# Altium PCB NewSmartwatch_V1.PcbDoc
Units mm, origin at the board's own origin, x right, y up, seen from the top; angles counter-clockwise.
Board outline 41.47 x 46.71 mm, 4 copper layers (Top Layer, GND1, GND3, Bottom Layer), stack 1.527 mm thick; 41 components, 42 nets, 260 pads, 107 vias.
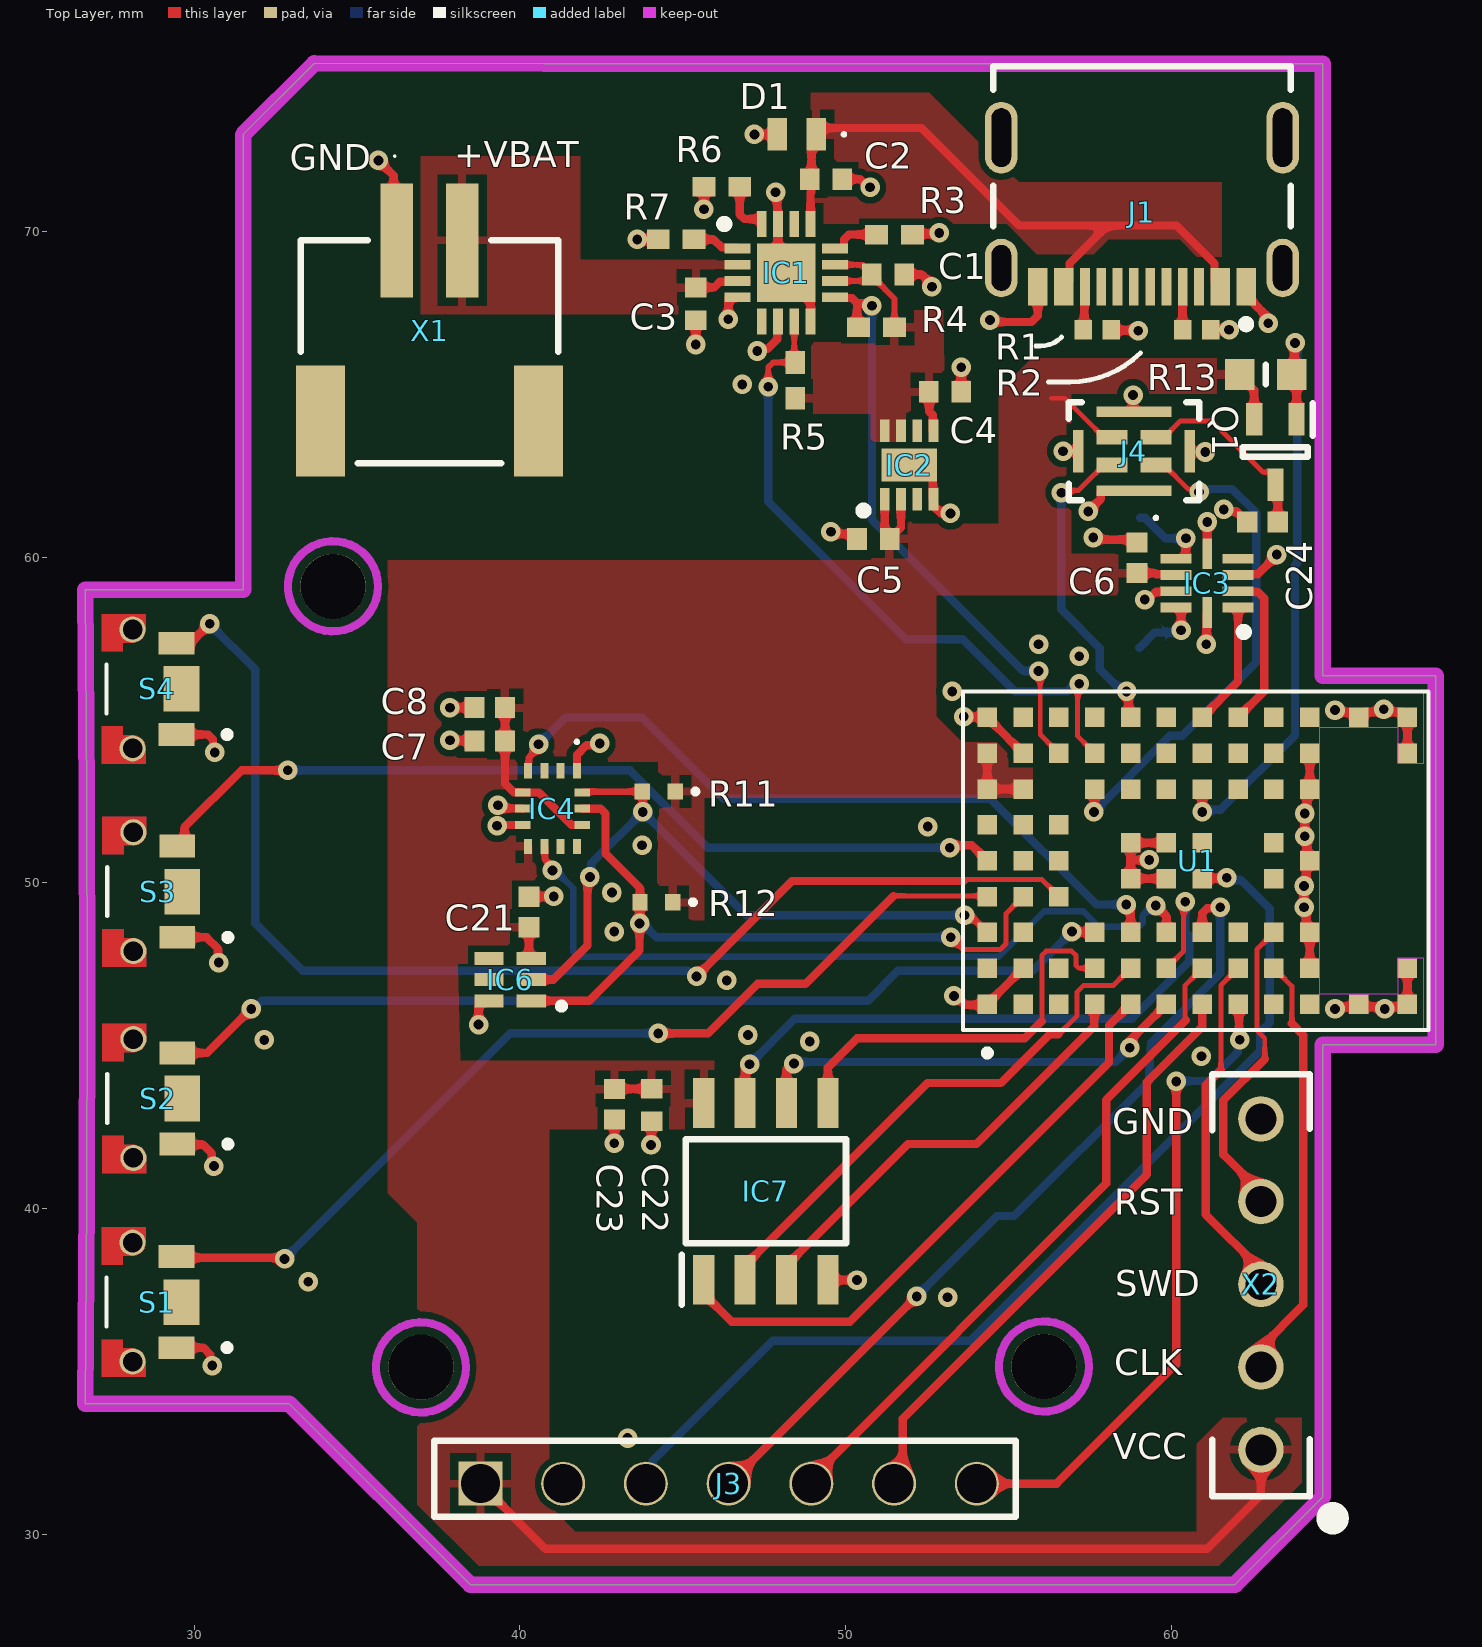
[diagram p0: Top Layer view]
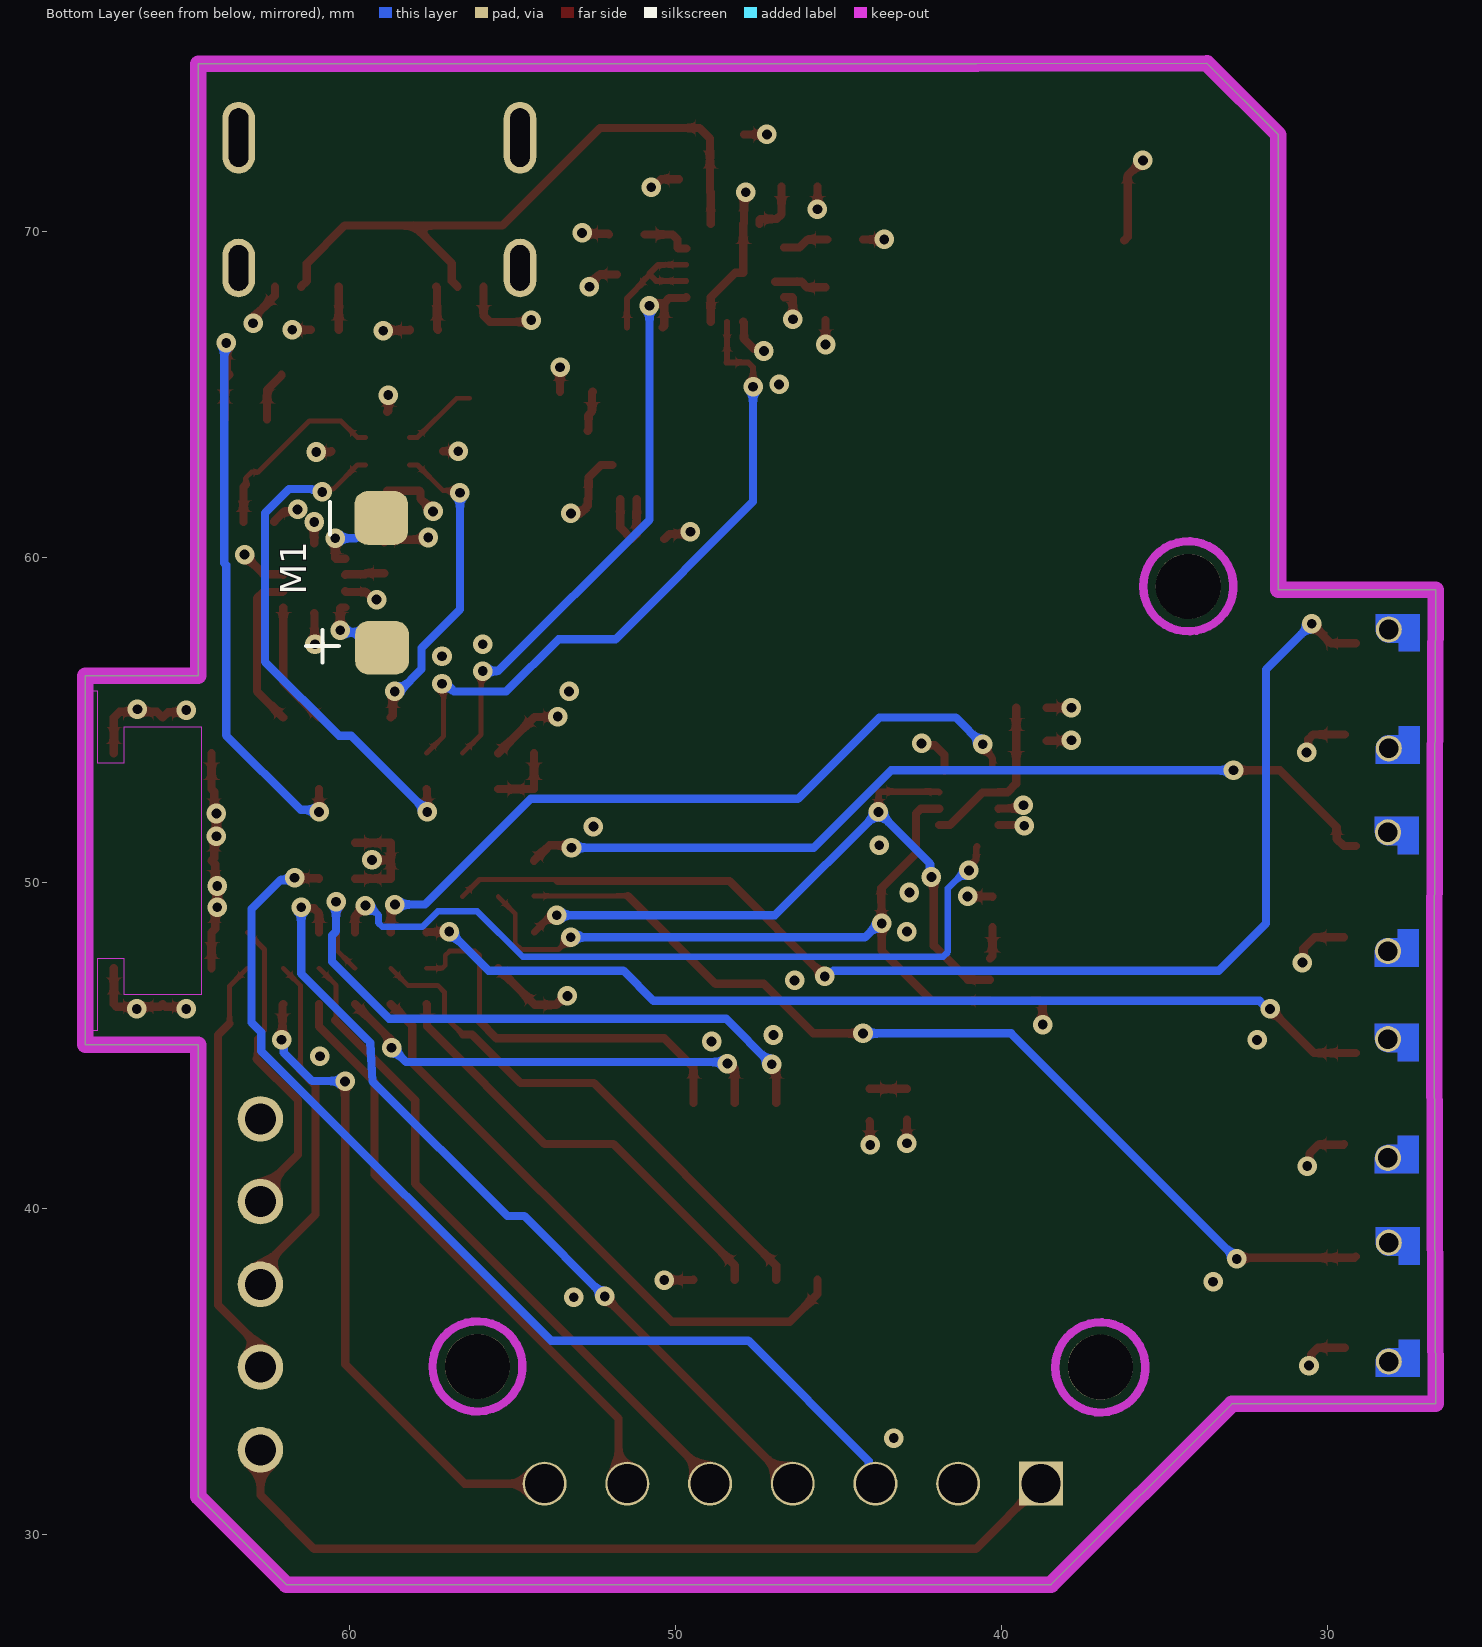
[diagram p1: Bottom Layer view, seen from below]
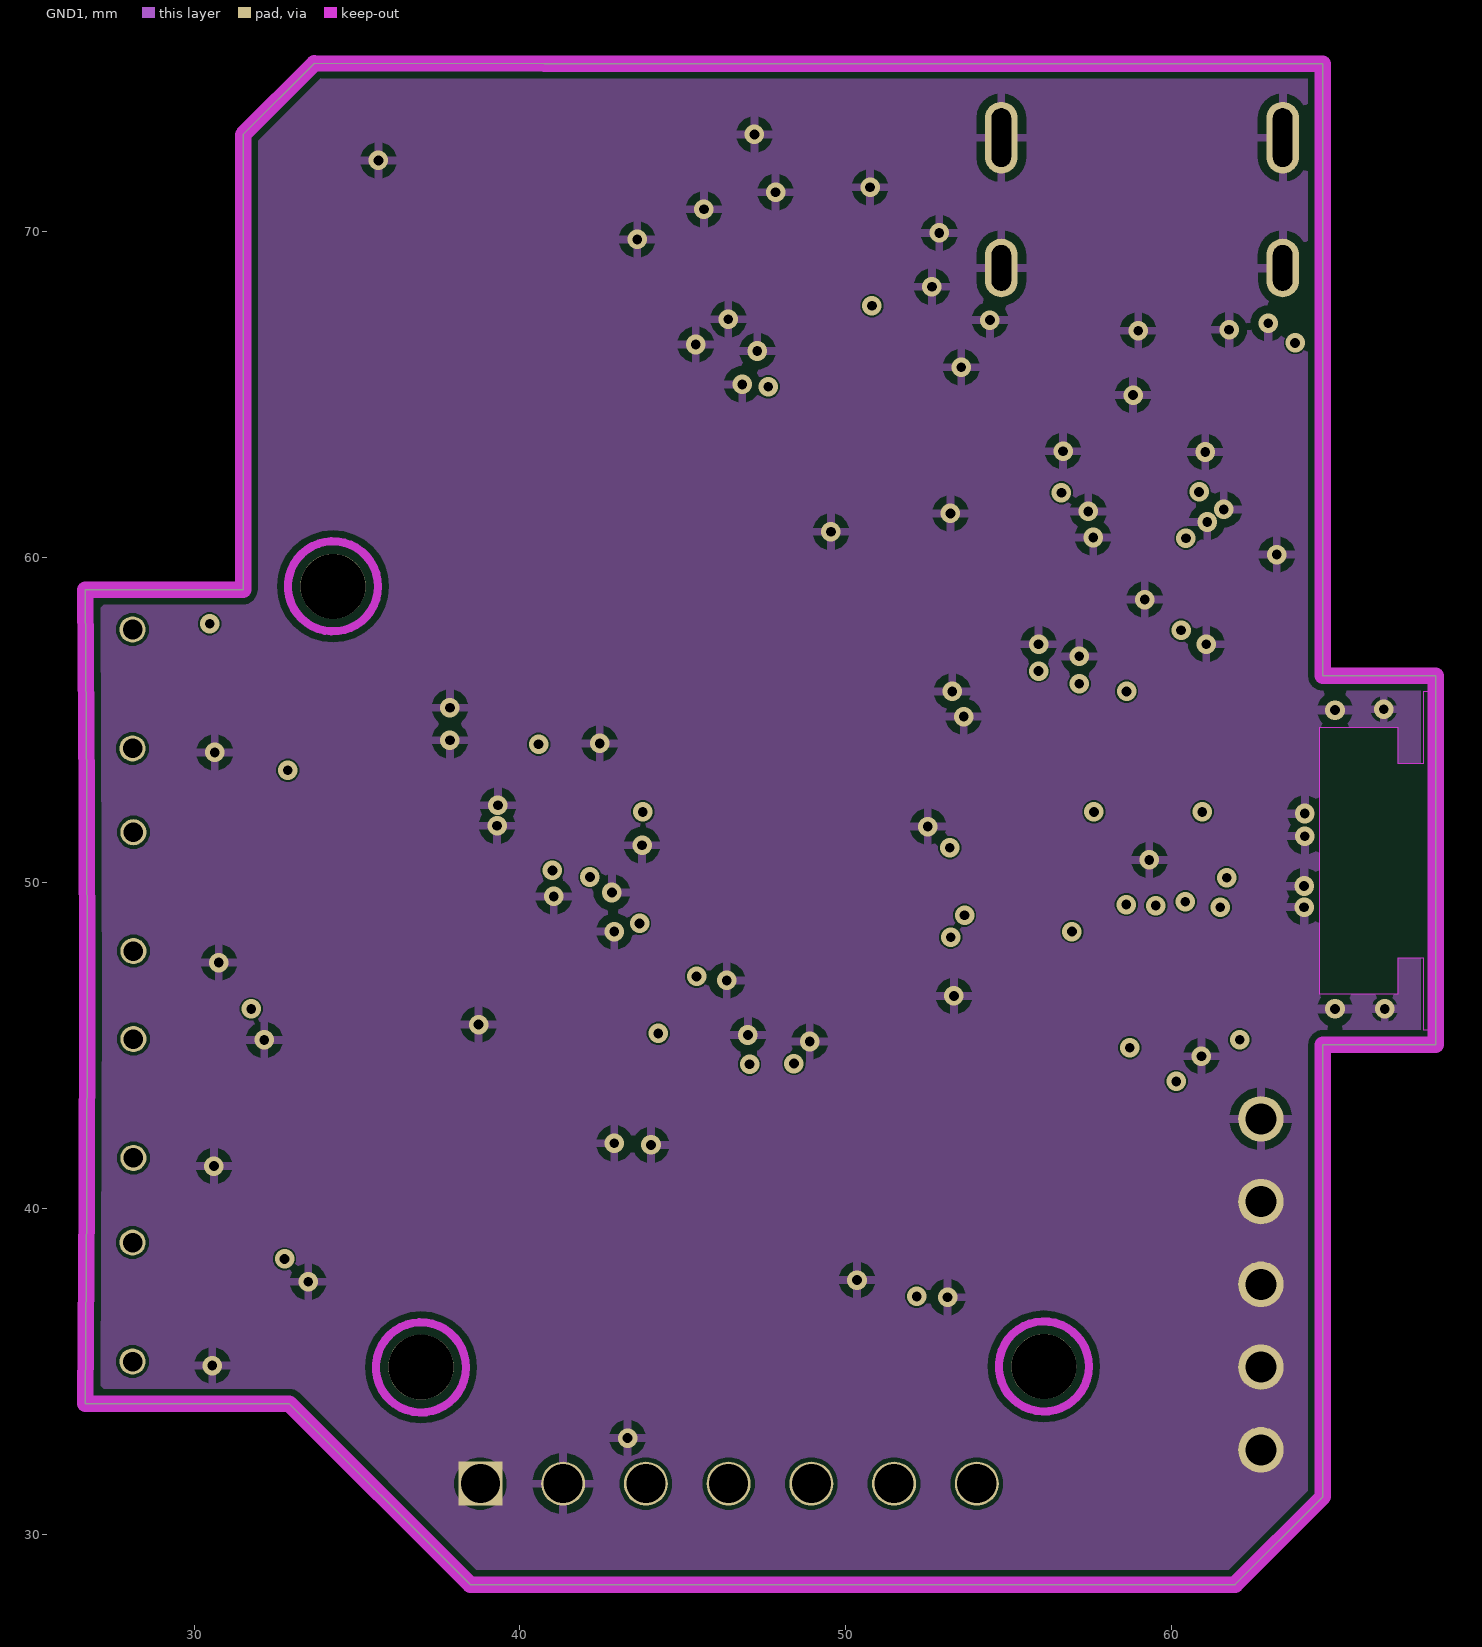
[diagram p2: GND1]
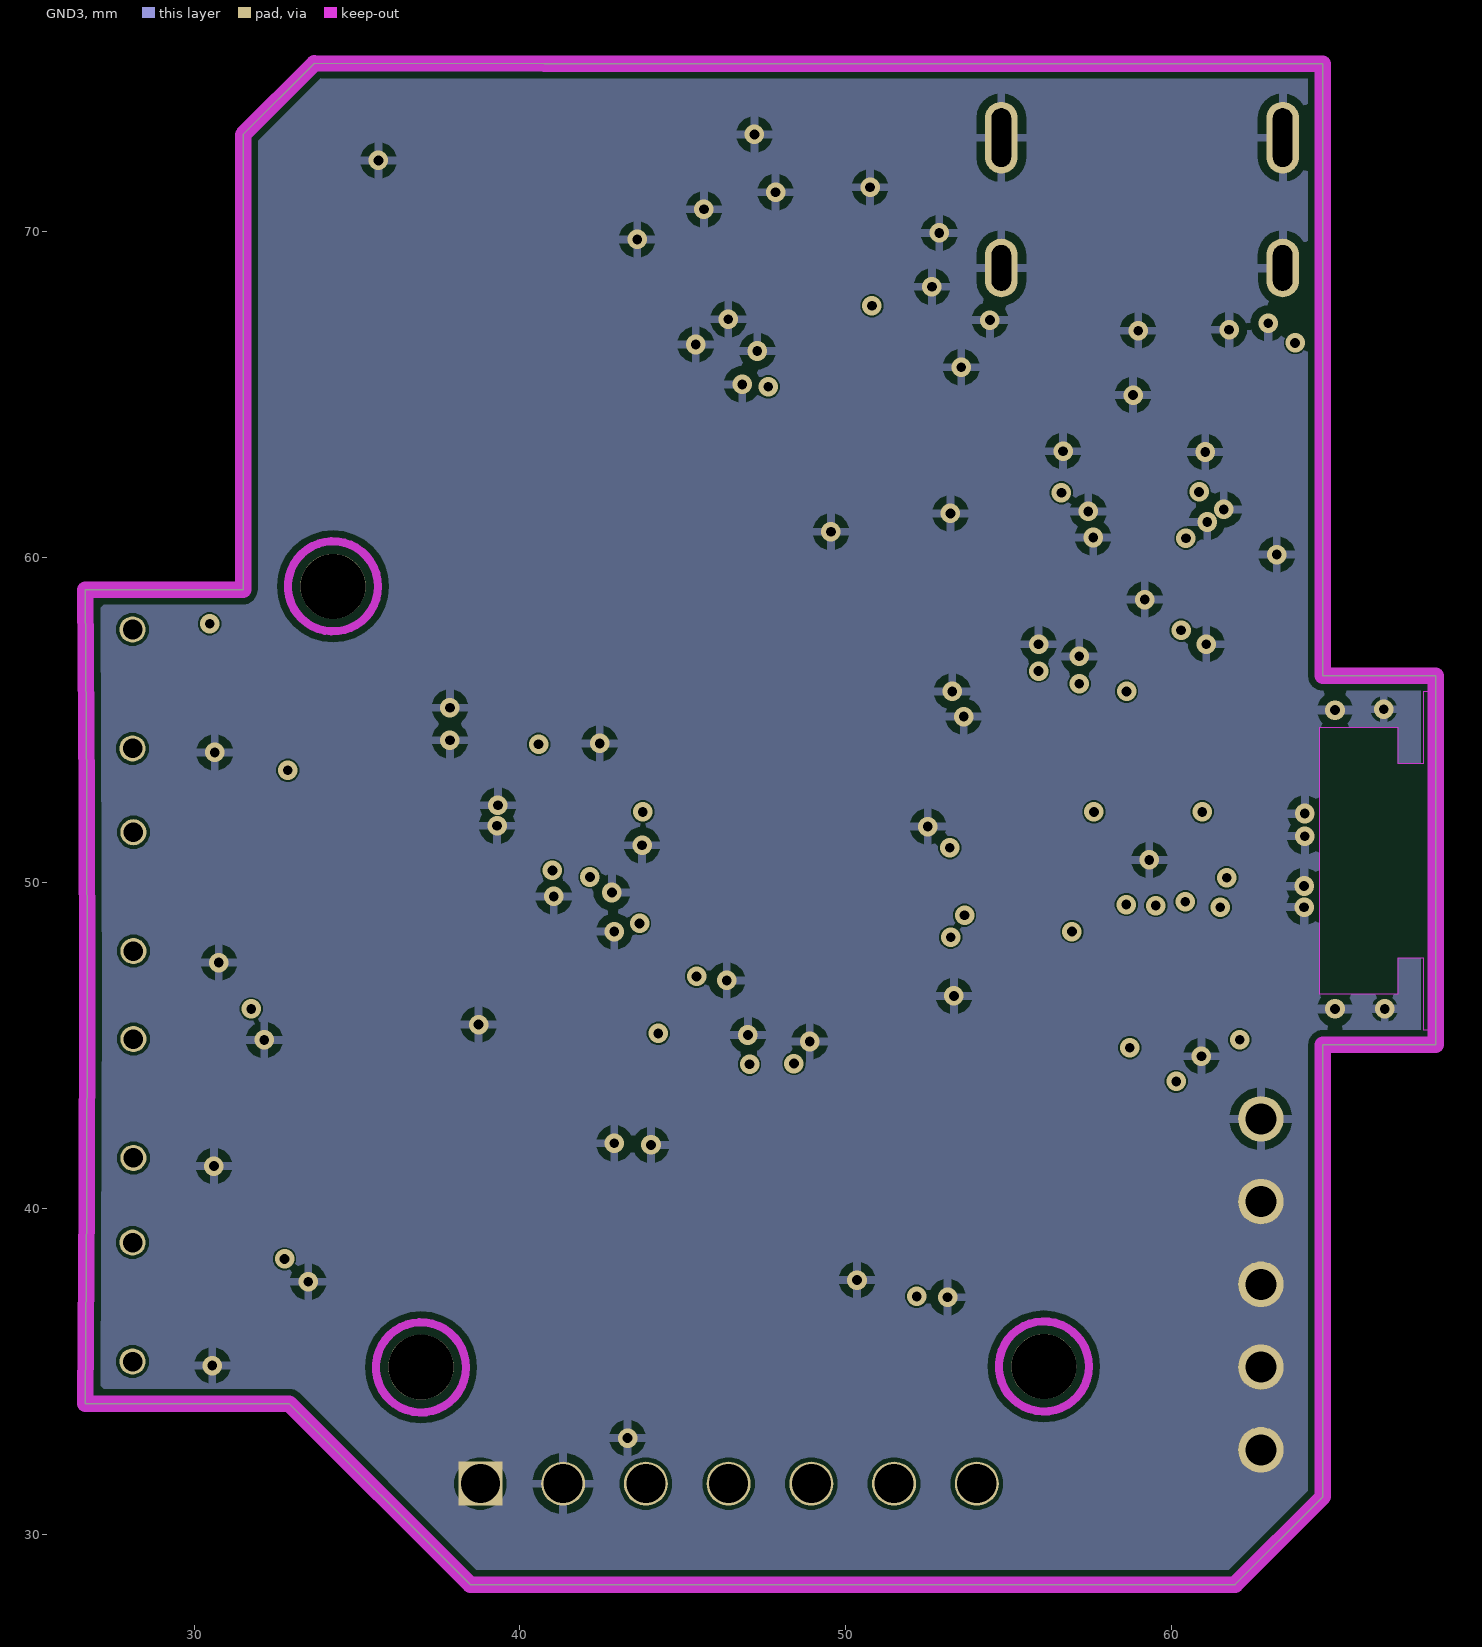
[diagram p3: GND3]
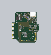
[diagram p4: 3D render of the assembled board from above, using the file's embedded part models]

## Layer stack, top to bottom
Top Solder: solder mask 0.0102, Solder Resist, Dk 3.5
Top Layer: signal copper 0.0175
Dielectric 2: prepreg 0.196, PP-006, Dk 4.1
GND1: signal copper 0.035
Core: core 1.03, PP-006, Dk 4.1
GND3: signal copper 0.035
Dielectric 3: prepreg 0.196, PP-006, Dk 4.1
Bottom Layer: signal copper 0.0175
Bottom Solder: solder mask 0.0102, Solder Resist, Dk 3.5

## Board outline
61.956,28.451 38.474,28.451 32.924,34.001 26.658,34.001 ccw(c-1494.274,46.501) 26.658,59.001 31.499,59.001 31.499,72.969 33.687,75.157 40.749,75.143 64.652,75.143 64.652,56.351 68.124,56.351 68.124,45.026 64.652,45.026 64.652,31.147

## Design rules (kind name [scope] priority, off if disabled: settings)
Clearance SOMkeepOut [InComponent('U1') vs InNet('GND') OR InNet('No Net')] p1: gap=0 ignorepadtopadclearanceinfootprint=TRUE
Clearance SOMTrackwidth [All vs InComponent('U1')] p2: gap=0.15 ignorepadtopadclearanceinfootprint=TRUE
Clearance USB [InNetClass('DIFF90')] p3: gap=0.125 ignorepadtopadclearanceinfootprint=TRUE
Clearance [All] p4: gap=0.2 ignorepadtopadclearanceinfootprint=TRUE
DiffPairsRouting DiffPair_DiffPairsRouting [InDifferentialPairClass('DIFF90')] p1: maxlimit=0.127 minlimit=0.127 mostfreqgap=0.127 toplayer_minwidth=0.28 toplayer_maxwidth=0.28 toplayer_prefwidth=0.28 midlayer1_minwidth=0.122 midlayer1_maxwidth=0.122 midlayer1_prefwidth=0.122 midlayer4_minwidth=0.122 midlayer4_maxwidth=0.122 midlayer4_prefwidth=0.122 bottomlayer_minwidth=0.28 bottomlayer_maxwidth=0.28 bottomlayer_prefwidth=0.28 impedanceprofiledriven=TRUE impedanceprofileid={649FCB01-131D-49EB-AE6B-DDDBD2AFC498} impedanceprofilevalue=90.000000 maxuncoupledlength=12.7
DiffPairsRouting [All] p2: maxlimit=0.254 minlimit=0.254 mostfreqgap=0.254 toplayer_minwidth=0.254 toplayer_maxwidth=0.381 toplayer_prefwidth=0.381 midlayer1_minwidth=0.254 midlayer1_maxwidth=0.381 midlayer1_prefwidth=0.381 midlayer4_minwidth=0.254 midlayer4_maxwidth=0.381 midlayer4_prefwidth=0.381 bottomlayer_minwidth=0.254 bottomlayer_maxwidth=0.381 bottomlayer_prefwidth=0.381 maxuncoupledlength=12.7
MatchedLengths DiffPair_MatchedLengths [InDifferentialPair ('USB_DP1')] p1: tolerance=25.4 checknetsindiffpair=FALSE checkdiffpairvsdiffpair=TRUE checkxsignals=TRUE checkothers=TRUE usedelayunits=TRUE delaytolerance=100.000000
MinimumSolderMaskSliver [All] p1: minsoldermaskwidth=0.1
PlaneConnect [All] p1: planeconnectstyle=Direct reliefexpansion=0.508 reliefentries=4 reliefconductorwidth=0.254 reliefairgap=0.254
PolygonConnect [All] p1: connectstyle=Relief reliefconductorwidth=0.254 reliefentries=4 polygonreliefangle="90 Angle" airgapwidth=0.254
RoutingVias [All] p1: holewidth=0.3 width=0.6 viastyle="Through Hole" minholewidth=0.3 minwidth=0.6 maxholewidth=0.3 maxwidth=0.6
SilkToSilkClearance [All] p1: silktosilkclearance=0.15
SilkToSolderMaskClearance [IsPad] p1: minsilkscreentomaskgap=0.15 clearancetoexposedcopper=TRUE
SolderMaskExpansion [All] p1: expansion=0.102 istentingtop=FALSE
SupplyNets "Schematic Supply Nets_3" [InNet('+3V3')] p1: voltage=0.000
SupplyNets "Schematic Supply Nets_2" [InNet('GND')] p2: voltage=0.000
SupplyNets "Schematic Supply Nets_1" [InNet('VBUS')] p3: voltage=0.000
SupplyNets "Schematic Supply Nets" [InNet('+4V5')] p4: voltage=0.000
ViasUnderSMD [All] p1: allowed=FALSE
Width [All] p1: maxlimit=1.27 minlimit=0.1 preferedwidth=0.254 midlayer1_minwidth=0.152 midlayer1_maxwidth=0.254 midlayer4_minwidth=0.254 midlayer4_maxwidth=0.254 bottomlayer_maxwidth=0.254 minimp=50.000000 maximp=50.000000 favimp=50.000000
25 further rules are at their usual default settings.

## Components (designator, comment, footprint, x,y, rotation, side; value= is the part's Value field where it differs from the comment)
C1 "4.7uF" CAPC1005X65N 51.3,68.675 r180 top
C2 "1uF" CAPC1005X65N 49.399,71.601 r180 top
C3 "4.7uF" CAPC1005X65N 45.399,67.776 r90 top
C4 "1uF" CAPC1005X65N 53.049,65.076 r180 top
C5 "1uF" CAPC1005X65N 50.849,60.551 r0 top
C6 "0402X7R104KT7AT" CAPC1005X61N 58.949,59.976 r270 top
C7 "0.1uF" CAPC1005X61N 39.074,54.352 r0 top
C8 "0.1uF" CAPC1005X61N 39.074,55.377 r0 top
C21 "0.1uF" CAPC1005X61N 40.274,49.102 r270 top
C22 "1uF" CAPC1005X65N 44.049,43.176 r270 top
C23 "0.1uF" CAPC1005X61N 42.899,43.201 r270 top
C24 "0.1uF" CAPC1005X61N 62.799,61.076 r180 top
D1 "STN161050U852" STN161050U852 48.499,72.976 r180 top
IC1 "BQ24075TRGTR" QFN50P300X300X100-17N-D 48.174,68.726 r0 top
IC2 "TPS7A2112PQWDSGRQ1" SON50P200X200X80-9N 51.949,62.826 r90 top
IC3 "DRV2603RUNT" QFN50P200X200X80-10N-D 61.099,59.201 r180 top
IC4 "BMI270" BMI270 40.999,52.277 r270 top
IC6 "APDS-9306-065" APDS9306065 39.699,47.027 r90 top
IC7 "AT25SF041B-SSHD-B" SOIC127P600X175-8N 47.549,40.526 r90 top
J1 "USB-C" FP-2171790001-MFG 59.099,71.726 r180 top locked
J3 "M22-7130742" SHDR7W50P0X200_1X7_1450X240X440P 38.599,31.551 r0 top locked
J4 "SPK0641HT4H-1" SPK0641HT4H1 58.852,63.251 r90 top
M1 "FIT0774" FIT0774 58.99,59.196 r90 bottom
Q1 "DMG1013UW-7" SOT65P210X110-3N 63.195,63.226 r270 top
R1 "5.1k" RESC1005X40 57.724,66.976 r0 top value=5.11kR
R2 "5.1k" RESC1005X40 60.774,66.976 r0 top value=5.11kR
R3 "10k" RESC1005X37N 51.499,69.901 r0 top
R4 "10k" RESC1005X37N 50.949,67.051 r180 top
R5 "10k" RESC1005X37N 48.449,65.426 r90 top
R6 "1.13K" RESC1005X37N 46.199,71.376 r0 top value=1.13kR
R7 "10k" RESC1005X37N 44.799,69.751 r0 top
R11 "4.7K" ERJPA2_(0402) 44.274,52.802 r180 top
R12 "4.7K" ERJPA2_(0402) 44.199,49.402 r180 top
R13 "150K" RESC1608X55N 62.899,65.601 r180 top
S1 "TL6340AF160Q" SW_TL6340AF160Q 28.106,37.126 r90 top
S2 "TL6340AF160Q" SW_TL6340AF160Q 28.131,43.376 r90 top
S3 "TL6340AF160Q" SW_TL6340AF160Q 28.131,49.726 r90 top
S4 "TL6340AF160Q" SW_TL6340AF160Q 28.106,55.951 r90 top
U1 "NORA-B106-00B" XCVR_NORA-B106-00B 59.849,50.676 r0 top locked
X1 "1769" 1769 37.224,69.726 r0 top
X2 "DOCK" SAMTEC_FTSH-105-XX-X-DV 59.799,30.416 r90 top locked

## Footprints (in the part's own frame and the unit in brackets; to place one, negate y for a bottom-side part, rotate by r counter-clockwise, add the part's x,y. Pads: shape width x height; smd on the part's side, far side on the other; paste and mask are expansions set on the pad)
1769 [mm]
  rect 1x3.5 smd: 1(-1,0) 2(1,0)
  rect 1.5x3.4 smd: 3(-3.35,-5.55) 4(3.35,-5.55)
  silkscreen extent -3.95,-6.85 3.95,2.61, body extent -3.95,-7.07 3.95,1.53, height 4.8
APDS9306065 [mm]
  rect 0.4x0.9 smd mask+0.051: 1(-0.65,-0.65) 2(0,-0.65) 3(0.65,-0.65) 4(0.65,0.65) 5(0,0.65) 6(-0.65,0.65)
  silkscreen extent -0.91,-1.67 -0.71,-1.47, body extent -1,-1 1,1, height 0.75
BMI270 [mm]
  rect 0.475x0.25 smd mask+0.051: 1(-1.163,0.75) 2(-1.163,0.25) 3(-1.163,-0.25) 4(-1.163,-0.75) 8(1.163,-0.75) 9(1.163,-0.25) 10(1.163,0.25) 11(1.163,0.75)
  rect 0.25x0.475 smd mask+0.051: 5(-0.5,-0.913) 6(0,-0.913) 7(0.5,-0.913) 12(0.5,0.913) 13(0,0.913) 14(-0.5,0.913)
  silkscreen extent -2.1,0.7 -2,0.8, body extent -1.5,-1.25 1.5,1.25, height 0.97
CAPC1005X61N [mm]
  rect 0.62x0.65 smd: 1(-0.47,0) 2(0.47,0)
  body extent -0.51,-0.26 0.51,0.26, height 0.61
CAPC1005X65N [mm]
  rect 0.6x0.67 smd: 1(-0.5,0) 2(0.5,0)
  body extent -0.5,-0.25 0.5,0.25, height 0.55
ERJPA2_(0402) [mm]
  rect 0.475x0.5 smd: 1(-0.5,0) 2(0.513,0)
  silkscreen extent -1.16,-0.05 -1.06,0.05, body extent -0.5,-0.25 0.5,0.25, height 0.35
FIT0774 [mm]
  rrect50% 1.65x1.65 smd paste-2539.97 mask-2539.97: +(-1.981,0.025) -(2.007,0.051)
  silkscreen extent -2.43,1.35 2.5,2.35
FP-2171790001-MFG [mm]
  rect 0.6x1.15 smd paste+0 mask+0: A1B12(-3.2,3.425) A4B9(-2.4,3.425) B1A12(3.2,3.425) B4A9(2.4,3.425)
  rect 0.3x1.15 smd paste+0 mask+0: A5(-1.25,3.425) A6(-0.25,3.425) A7(0.25,3.425) A8(1.25,3.425) B5(1.75,3.425) B6(0.75,3.425) B7(-0.75,3.425) B8(-1.75,3.425)
  rrect100% 1x1.8 hole 1.4 slot 0.6 at 0 deg paste-2539.97 mask+0: S1(-4.32,2.85) S2(4.32,2.85)
  rrect100% 1x2.2 hole 1.8 slot 0.6 at 0 deg paste-2539.97 mask+0: S3(-4.32,-1.15) S4(4.32,-1.15)
  silkscreen extent -4.57,-3.35 4.57,4.7, body extent -4.92,-3.45 4.92,4.1, height 0.25
QFN50P200X200X80-10N-D [mm]
  rect 0.95x0.3 smd: 1(-0.95,0.75) 2(-0.95,0.25) 3(-0.95,-0.25) 4(-0.95,-0.75) 6(0.95,-0.75) 7(0.95,-0.25) 8(0.95,0.25) 9(0.95,0.75)
  rect 0.3x0.95 smd: 5(0,-0.9) 10(0,0.9)
  silkscreen extent -1.25,1.38 -1,1.62, body extent -1,-1 1,1, height 0.8
QFN50P300X300X100-17N-D [mm]
  rect 0.8x0.3 smd: 1(-1.5,0.75) 2(-1.5,0.25) 3(-1.5,-0.25) 4(-1.5,-0.75) 9(1.5,-0.75) 10(1.5,-0.25) 11(1.5,0.25) 12(1.5,0.75)
  rect 0.3x0.8 smd: 5(-0.75,-1.5) 6(-0.25,-1.5) 7(0.25,-1.5) 8(0.75,-1.5) 13(0.75,1.5) 14(0.25,1.5) 15(-0.25,1.5) 16(-0.75,1.5)
  rect 1.8x1.8 smd: 17(0,0)
  silkscreen extent -2.02,1.38 -1.77,1.62, body extent -1.55,-1.55 1.55,1.55, height 1
RESC1005X37N [mm]
  rect 0.7x0.6 smd: 1(-0.55,0) 2(0.55,0)
  body extent -0.5,-0.25 0.5,0.25, height 0.32
RESC1005X40 [mm]
  rect 0.54x0.6 smd: 1(-0.43,0) 2(0.43,0)
RESC1608X55N [mm]
  rect 0.9x0.95 smd: 1(-0.8,0) 2(0.8,0)
  silkscreen extent 0,-0.3 0,0.3, body extent -0.8,-0.4 0.8,0.4, height 0.55
SAMTEC_FTSH-105-XX-X-DV [mm]
  round 1.4 hole 0.95: 1(2.175,-2.95) 2(4.715,-2.95) 3(7.255,-2.95) 4(9.795,-2.95) 5(12.335,-2.95)
  silkscreen extent -0.17,-5.4 13.7,-1.45
SHDR7W50P0X200_1X7_1450X240X440P [mm]
  round 1.35 hole 1.2: 1(15.427,0) 2(12.887,0) 3(10.347,0) 4(7.807,0) 5(5.267,0) 6(2.727,0)
  rect 1.35x1.35 hole 1.2: 7(0.187,0)
  silkscreen extent -1.22,-1.02 16.63,1.33
SOIC127P600X175-8N [mm]
  rect 1.525x0.65 smd: 1(-2.712,1.905) 2(-2.712,0.635) 3(-2.712,-0.635) 4(-2.712,-1.905) 5(2.712,-1.905) 6(2.712,-0.635) 7(2.712,0.635) 8(2.712,1.905)
  silkscreen extent -3.47,-2.46 1.6,2.58, body extent -3,-2.46 3,2.46, height 1.75
SON50P200X200X80-9N [mm]
  rect 0.7x0.3 smd: 1(-1.05,0.75) 2(-1.05,0.25) 3(-1.05,-0.25) 4(-1.05,-0.75) 5(1.05,-0.75) 6(1.05,-0.25) 7(1.05,0.25) 8(1.05,0.75)
  rect 1x1.7 smd: 9(0,0)
  silkscreen extent -1.52,1.27 -1.28,1.52, body extent -1,-1 1,1, height 0.77
SOT65P210X110-3N [mm]
  rect 1x0.5 smd: 1(-1,0.65) 2(-1,-0.65) 3(1,0)
  silkscreen extent -1.5,-1 0.15,1.15, body extent -1.05,-1 1.05,1, height 1.1
SPK0641HT4H1 [mm]
  rect 0.45x0.95 smd: 1(-0.425,-0.675) 2(-0.425,0.675) 3(0.425,0.675) 4(0.425,-0.675)
  rect 1.3x0.325 smd: 5(0,-1.712) 7(0,1.712)
  rect 0.325x2.3 smd: 6(-1.212,0) 8(1.212,0)
  silkscreen extent -2.1,-2 1.5,2, body extent -1.5,-2 1.5,2, height 1
STN161050U852 [mm]
  rect 0.6x1 smd: 1(-0.6,0) 2(0.6,0)
  silkscreen extent -1.5,-0.05 -1.4,0.05, body extent -0.8,-0.5 0.8,0.5, height 0.5
SW_TL6340AF160Q [mm]
  rect 0.7x1.1 smd: 1(-1.4,-1.35) 2(1.4,-1.35)
  round 0.8 hole 0.6 mask+0: SH1(-1.825,0) SH2(1.825,0)
  rect 1.4x1.1 smd: SH3(0,-1.5)
  Top Layer region: 2.3,-0.4 1.825,-0.4 1.804,-0.399 1.783,-0.398 1.762,-0.395 1.742,-0.391 1.721,-0.386 1.701,-0.38 1.682,-0.373 1.662,-0.365 1.643,-0.356 1.625,-0.346 1.607,-0.335 1.59,-0.324 1.573,-0.311 1.557,-0.297 1.542,-0.283 1.528,-0.268 1.514,-0.252 1.501,-0.235 1.49,-0.218 1.479,-0.2 1.469,-0.182 1.46,-0.163 1.452,-0.143 1.445,-0.124 1.439,-0.104 1.434,-0.083 1.43,-0.063 1.427,-0.042 1.426,-0.021 1.425,0 1.425,0.3 1.15,0.3 1.15,0.95 2.3,0.95
  Top Layer region: -1.15,0.3 -1.425,0.3 -1.425,0 -1.426,-0.021 -1.427,-0.042 -1.43,-0.063 -1.434,-0.083 -1.439,-0.104 -1.445,-0.124 -1.452,-0.143 -1.46,-0.163 -1.469,-0.182 -1.479,-0.2 -1.49,-0.218 -1.501,-0.235 -1.514,-0.252 -1.528,-0.268 -1.542,-0.283 -1.557,-0.297 -1.573,-0.311 -1.59,-0.324 -1.607,-0.335 -1.625,-0.346 -1.643,-0.356 -1.662,-0.365 -1.682,-0.373 -1.701,-0.38 -1.721,-0.386 -1.742,-0.391 -1.762,-0.395 -1.783,-0.398 -1.804,-0.399 -1.825,-0.4 -2.3,-0.4 -2.3,0.95 -1.15,0.95
  Bottom Layer region: 2.3,-0.4 1.825,-0.4 1.804,-0.399 1.783,-0.398 1.762,-0.395 1.742,-0.391 1.721,-0.386 1.701,-0.38 1.682,-0.373 1.662,-0.365 1.643,-0.356 1.625,-0.346 1.607,-0.335 1.59,-0.324 1.573,-0.311 1.557,-0.297 1.542,-0.283 1.528,-0.268 1.514,-0.252 1.501,-0.235 1.49,-0.218 1.479,-0.2 1.469,-0.182 1.46,-0.163 1.452,-0.143 1.445,-0.124 1.439,-0.104 1.434,-0.083 1.43,-0.063 1.427,-0.042 1.426,-0.021 1.425,0 1.425,0.3 1.15,0.3 1.15,0.95 2.3,0.95
  Bottom Layer region: -1.15,0.3 -1.425,0.3 -1.425,0 -1.426,-0.021 -1.427,-0.042 -1.43,-0.063 -1.434,-0.083 -1.439,-0.104 -1.445,-0.124 -1.452,-0.143 -1.46,-0.163 -1.469,-0.182 -1.479,-0.2 -1.49,-0.218 -1.501,-0.235 -1.514,-0.252 -1.528,-0.268 -1.542,-0.283 -1.557,-0.297 -1.573,-0.311 -1.59,-0.324 -1.607,-0.335 -1.625,-0.346 -1.643,-0.356 -1.662,-0.365 -1.682,-0.373 -1.701,-0.38 -1.721,-0.386 -1.742,-0.391 -1.762,-0.395 -1.783,-0.398 -1.804,-0.399 -1.825,-0.4 -2.3,-0.4 -2.3,0.95 -1.15,0.95
  silkscreen extent -1.5,-3 0.75,0.8, body extent -1.92,-1.35 1.92,1.55, height 1.55
XCVR_NORA-B106-00B [mm]
  rect 0.6x0.6 smd: A1(-5.5,-4.4) A2(-5.5,-3.3) A3(-5.5,-2.2) A4(-5.5,-1.1) A5(-5.5,0) A6(-5.5,1.1) A7(-5.5,2.2) A8(-5.5,3.3) A9(-5.5,4.4) B1(-4.4,-4.4) B2(-4.4,-3.3) B3(-4.4,-2.2) B4(-4.4,-1.1) B5(-4.4,0) B6(-4.4,1.1) B7(-4.4,2.2) B8(-4.4,3.3) B9(-4.4,4.4) C1(-3.3,-4.4) C2(-3.3,-3.3) C4(-3.3,-1.1) C5(-3.3,0) C6(-3.3,1.1) C8(-3.3,3.3) C9(-3.3,4.4) D1(-2.2,-4.4) D2(-2.2,-3.3) D3(-2.2,-2.2) D7(-2.2,2.2) D8(-2.2,3.3) D9(-2.2,4.4) E1(-1.1,-4.4) E2(-1.1,-3.3) E3(-1.1,-2.2) E4(-1.1,-0.55) E5(-1.1,0.55) E7(-1.1,2.2) E8(-1.1,3.3) E9(-1.1,4.4) F1(0,-4.4) F2(0,-3.3) F3(0,-2.2) F4(0,-0.55) F5(0,0.55) F7(0,2.2) F8(0,3.3) F9(0,4.4) G1(1.1,-4.4) G2(1.1,-3.3) G3(1.1,-2.2) G4(1.1,-0.55) G5(1.1,0.55) G7(1.1,2.2) G8(1.1,3.3) G9(1.1,4.4) H1(2.2,-4.4) H2(2.2,-3.3) H3(2.2,-2.2) H7(2.2,2.2) H8(2.2,3.3) H9(2.2,4.4) J1(3.3,-4.4) J2(3.3,-3.3) J3(3.3,-2.2) J4(3.3,-0.55) J5(3.3,0.55) J7(3.3,2.2) J8(3.3,3.3) J9(3.3,4.4) K1(4.4,-4.4) K2(4.4,-3.3) K3(4.4,-2.2) K5(4.4,0) K7(4.4,2.2) K8(4.4,3.3) K9(4.4,4.4) L1(5.9,-4.4) L9(5.9,4.4) M1(7.4,-4.4) M2(7.4,-3.3) M8(7.4,3.3) M9(7.4,4.4)
  Keep-Out Layer region: 8.05,-5.2 7.9,-5.2 7.9,-3 7.1,-3 7.1,-4.1 4.7,-4.1 4.7,4.1 7.1,4.1 7.1,3 7.9,3 7.9,5.2 8.05,5.2
  Keep-Out Layer region: 8.05,-5.2 7.9,-5.2 7.9,-3 7.1,-3 7.1,-4.1 4.7,-4.1 4.7,4.1 7.1,4.1 7.1,3 7.9,3 7.9,5.2 8.05,5.2
  Keep-Out Layer region: 8.05,-5.2 7.9,-5.2 7.9,-3 7.1,-3 7.1,-4.1 4.7,-4.1 4.7,4.1 7.1,4.1 7.1,3 7.9,3 7.9,5.2 8.05,5.2
  silkscreen extent -6.25,-6 8.05,5.2

## Part data
C1 C3: library part GRM31CR61A475KA01L, "Multilayer Ceramic Capacitors MLCC - SMD/SMT 4.7 uF 10 VDC 20% 0402 X5R", Manufacturer_Name="Murata Electronics", Mouser Part Number=81-GRM426R475K10L, Arrow Part Number=GRM31CR61A475KA01L, Arrow Price/Stock=https://www.arrow.com/en/products/grm31cr61a475ka01l/murata-manufacturing, Datasheet Link=http://www.murata.com/~/media/webrenewal/support/library/catalog/products/capacitor/mlcc/c02e.pdf, Height=1.8mm, Manufacturer_Part_Number=GRM31CR61A475KA01L, Mouser Price/Stock=https://www.mouser.co.uk/ProductDetail/Murata-Electronics/GRM31CR61A475KA01L?qs=v6FXEKp3YeVDfOIVbbYCqg%3D%3D
C2 C4 C5 C22: library part CC0402KRX5R6BB105, "Multilayer Ceramic Capacitors MLCC - SMD/SMT 10V 1uF X5R 0402 10% HI CV", Manufacturer_Name=YAGEO, Mouser Part Number=603-CC402KRX5R6BB105, Arrow Part Number=CC0402KRX5R6BB105, Arrow Price/Stock=https://www.arrow.com/en/products/cc0402krx5r6bb105/yageo?region=nac, Datasheet Link=https://www.yageo.com/upload/media/product/app/datasheet/mlcc/upy-gphc_x5r_4v-to-50v.pdf, Height=0.55mm, Manufacturer_Part_Number=CC0402KRX5R6BB105, Mouser Price/Stock=https://www.mouser.co.uk/ProductDetail/YAGEO/CC0402KRX5R6BB105?qs=BKNoF%2F0xMNu0TvpE6ze2Iw%3D%3D
C6: "Multilayer Ceramic Capacitors MLCC - SMD/SMT 16V 0.1uF X7R 10%", Manufacturer_Name="Kyocera AVX", Mouser Part Number=581-0402X7R104KT7AT, Datasheet Link=https://www.mouser.es/datasheet/2/40/general_purpose-3169586.pdf, Height=0.61mm, Manufacturer_Part_Number=0402X7R104KT7AT, Mouser Price/Stock=https://www.mouser.co.uk/ProductDetail/KYOCERA-AVX/0402X7R104KT7AT?qs=DPoM0jnrROXD467pFR2ukA%3D%3D
C7 C8 C21 C23 C24: library part 0402X7R104KT7AT, "Multilayer Ceramic Capacitors MLCC - SMD/SMT 16V 0.1uF X7R 10%", Manufacturer_Name="Kyocera AVX", Mouser Part Number=581-0402X7R104KT7AT, Datasheet Link=https://www.mouser.es/datasheet/2/40/general_purpose-3169586.pdf, Height=0.61mm, Manufacturer_Part_Number=0402X7R104KT7AT, Mouser Price/Stock=https://www.mouser.co.uk/ProductDetail/KYOCERA-AVX/0402X7R104KT7AT?qs=DPoM0jnrROXD467pFR2ukA%3D%3D
D1: "TVS Diode (Uni-directional)", Manufacturer_Name=Eaton, Mouser Part Number=504-STN161050U852, Datasheet Link=https://www.digikey.com/en/products/detail/eaton-electronics-division/STN161050U852/13280470?msockid=3e3afa68a50969ca3057ef1ca4c9684b, Height=0.55mm, Manufacturer_Part_Number=STN161050U852, Mouser Price/Stock=https://www.mouser.co.uk/ProductDetail/Bussmann-Eaton/STN161050U852?qs=DPoM0jnrROX%2FlbVCTeWaTw%3D%3D
IC1: "Gerenciadores de bateria 1.5A USB-Friendly Li Ion Batt Charger", Manufacturer_Name="Texas Instruments", Mouser Part Number=595-BQ24075TRGTR, Arrow Part Number=BQ24075TRGTR, Arrow Price/Stock=https://www.arrow.com/en/products/bq24075trgtr/texas-instruments?region=nac, Datasheet Link=http://componentsearchengine.com/Datasheets/1/BQ24075TRGTR.pdf, Height=1mm, Manufacturer_Part_Number=BQ24075TRGTR, Mouser Price/Stock=https://www.mouser.co.uk/ProductDetail/Texas-Instruments/BQ24075TRGTR?qs=%2Fqzd9s%252BcLd4uxZAT5jNskQ%3D%3D
IC2: "LDO Voltage Regulators Automotive, 500mA, low-noise ultra-low-IQ high-PSRR low-dropout (LDO) voltage regulator", Manufacturer_Name="Texas Instruments", Datasheet Link=https://www.ti.com/lit/gpn/tps7a21-q1, Height=0.8mm, Manufacturer_Part_Number=TPS7A2112PQWDSGRQ1
IC3: "Motor / Motion / Ignition Controllers & Drivers Haptic Driver w/Auto Resonance Tracking", Manufacturer_Name="Texas Instruments", Mouser Part Number=595-DRV2603RUNT, Arrow Part Number=DRV2603RUNT, Arrow Price/Stock=https://www.arrow.com/en/products/drv2603runt/texas-instruments, Datasheet Link=http://www.ti.com/lit/ds/symlink/drv2603.pdf, Height=0.8mm, Manufacturer_Part_Number=DRV2603RUNT, Mouser Price/Stock=https://www.mouser.co.uk/ProductDetail/Texas-Instruments/DRV2603RUNT?qs=y0LsnOHuQQ66fXxKAgGo4A%3D%3D
IC4: "IMUs - Inertial Measurement Units Smart Ultra-Low Power Inertial Measurement Unit (IMU) for Wearable Applications", Manufacturer_Name=BOSCH, Mouser Part Number=262-BMI270, Arrow Part Number=BMI270, Arrow Price/Stock=https://www.arrow.com/en/products/bmi270/bosch?utm_currency=USD&region=nac, Datasheet Link=https://www.bosch-sensortec.com/media/boschsensortec/downloads/datasheets/bst-bmi270-ds000.pdf, Height=0.87mm, Manufacturer_Part_Number=BMI270, Mouser Price/Stock=https://www.mouser.co.uk/ProductDetail/Bosch-Sensortec/BMI270?qs=u16ybLDytRYIj%252BjQEee88A%3D%3D
IC6: "Ambient Light Sensors Digital Ambient Light Sensor", Manufacturer_Name="Avago Technologies", Mouser Part Number=630-APDS-9306-065, Datasheet Link=A19870331a, Height=0.75mm, Manufacturer_Part_Number=APDS-9306-065, Mouser Price/Stock=https://www.mouser.co.uk/ProductDetail/Broadcom-Avago/APDS-9306-065?qs=JUmsgfbaopRTut8Cx4p19A%3D%3D
IC7: "NOR Flash 4 Mbit, 3.0V (2.5V to 3.6V), -40C to 85C, SOIC-N 150mil (Tube), Single, Dual, Quad SPI NOR Flash", Manufacturer_Name="Renesas Electronics", Mouser Part Number=988-AT25SF041BSSHDB, Datasheet Link=https://www.mouser.in/datasheet/2/698/REN_DS_AT25SF041B_190H_062022_DST_20220603_1-3076039.pdf, Height=1.75mm, Manufacturer_Part_Number=AT25SF041B-SSHD-B, Mouser Price/Stock=https://www.mouser.co.uk/ProductDetail/Renesas-Dialog/AT25SF041B-SSHD-B?qs=IS%252B4QmGtzzoAv7Cb4U2tFA%3D%3D
J1: library part 217179-0001, "USB Connector, 16 Contact(s), Female, Right Angle, Surface Mount Terminal, Locking, Receptacle", Manufacturer=Molex, Supplier Part Number=538-217179-0001, Category="USB Connectors", Manufacturer Part Number=217179-0001, Pricing="1=0,9, 10=0,745, 50=0,745, 100=0,622, 1000=0,622, 10000=0,446 (USD)", RoHS=No, Stock=4841, Supplier=Mouser
J3: "Connector", Manufacturer_Name=Harwin, Mouser Part Number=855-M22-7130742, Datasheet Link=https://cdn.harwin.com/pdfs/M22-713.pdf, Height=4.4mm, Manufacturer_Part_Number=M22-7130742, Mouser Price/Stock=https://www.mouser.co.uk/ProductDetail/Harwin/M22-7130742?qs=ulE8k0yEMYatGybRLMpABg%3D%3D
J4: "Microfones MEMS SISONIC MEMS MICROPHONE;Digital;Top;64.5dB SNR;120dB SPL;-26 +/-1dBV;35Hz;70dB PSRR;Low Power: 230 / Standard: 630;1.8V", Manufacturer_Name="Knowles Johanson Manufacturing", Mouser Part Number=721-SPK0641HT4H-1, Datasheet Link=https://www.knowles.com/docs/default-source/model-downloads/spk0641ht4h-1-rev-a.pdf, Height=1.1mm, Manufacturer_Part_Number=SPK0641HT4H-1, Mouser Price/Stock=https://www.mouser.com/Search/Refine.aspx?Keyword=721-SPK0641HT4H-1
M1: "Mini Vibration Motor (10*2.7MM)", Manufacturer=DFRobot, Supplier Part Number=426-FIT0774, Category="Motors and Drives", Manufacturer Part Number=FIT0774, Pricing="1=0,99, 10=0,99, 50=0,99, 100=0,99, 1000=0,99, 10000=0,99 (USD)", RoHS=No, Stock=3316, Supplier=Mouser
Q1: "MOSFET (P-Channel)", Manufacturer_Name="Diodes Incorporated", Mouser Part Number=621-DMG1013UW-7, Arrow Part Number=DMG1013UW-7, Arrow Price/Stock=https://www.arrow.com/en/products/dmg1013uw-7/diodes-incorporated?region=nac, Datasheet Link=https://www.diodes.com//assets/Datasheets/ds31861.pdf, Height=1.1mm, Manufacturer_Part_Number=DMG1013UW-7, Mouser Price/Stock=https://www.mouser.co.uk/ProductDetail/Diodes-Incorporated/DMG1013UW-7?qs=GWgl%252BsiMZr9p7lJcuAyJvw%3D%3D
R1 R2: library part ERJ-2RHD512X, "Fixed Resistor, Metal Glaze/thick Film, 0.063W, 5110ohm, 50V, 0.5% +/-Tol, 50ppm/Cel, Surface Mount, 0402", Case/Package=0402, Manufacturer=Panasonic, Manufacturer Series=ERJ2R, Max Operating Temperature=125°C, Min Operating Temperature=-55°C, Package Shape=Rectangular, Power=63mW, Rated Temperature=70°C, Resistor Type="FIXED RESISTOR", Supplier Part Number=667-ERJ-2RHD512X, Temperature Coefficient=50ppm/°C, Tolerance=0.5%, Working Voltage=50V, ComponentLink1Description=https://datasheet.ciiva.com:443/pdfs/VipMasterCap/Capacitor/PANA/PANAS11022/PANAS11022-1.pdf?src-supplier=IHS+Markit, ComponentLink1URL=https://datasheet.ciiva.com:443/pdfs/VipMasterCap/Capacitor/PANA/PANAS11022/PANAS11022-1.pdf?src-supplier=IHS+Markit, ComponentLink2Description=https://datasheet.ciiva.com/24037/aoa0000ce2-24037669.pdf?src-supplier=Mouser, ComponentLink2URL=https://datasheet.ciiva.com/24037/aoa0000ce2-24037669.pdf?src-supplier=Mouser, JESD-609 Code=e3, Manufacturer Part Number=ERJ-2RHD512X, Mounting Technology="Surface Mount", Packaging="Tape and Reel", Pins=2, Pricing="1=0,13, 10=0,11, 50=0,11, 100=0,043, 1000=0,019, 10000=0,019 (USD)", Reach SVHC Compliant=Yes, RoHS=Yes, RoHS Compliant=Yes, Stock=18329, Supplier=Mouser, Technology="METAL GLAZE/THICK FILM", Terminal Finish=Tin, Termination=Wraparound
R3 R4 R5 R7: library part MCS0402MD1002BE100, "Resistores de Filme Fino - SMD .063W 10Kohms 0.1% 0402 25ppm Auto", Manufacturer_Name=Vishay, Mouser Part Number=594-MCS0402MD1002BE1, Arrow Part Number=MCS0402MD1002BE100, Arrow Price/Stock=https://www.arrow.com/en/products/mcs0402md1002be100/vishay?region=nac, Datasheet Link=http://www.vishay.com/docs/28705/mcx0x0xpro.pdf, Height=0.37mm, Manufacturer_Part_Number=MCS0402MD1002BE100, Mouser Price/Stock=https://www.mouser.co.uk/ProductDetail/Vishay-Beyschlag/MCS0402MD1002BE100?qs=3SvaY9RawMIFge2HspqWnA%3D%3D
R6: library part AF0402FR-071K13L, "Fixed Resistor, Metal Glaze/thick Film, 0.0625W, 1130ohm, 50V, 1% +/-Tol, 100ppm/Cel, Surface Mount, 0402", Case/Package=0402, Manufacturer=Yageo, Max Operating Temperature=155°C, Min Operating Temperature=-55°C, Package Height=0.32mm, Package Length=1mm, Package Style=SMTMeter, Package Width=0.5mm, Power=62.5mW, Rated Temperature=70°C, Resistor Type="FIXED RESISTOR", Supplier Part Number=603-AF0402FR-071K13L, Temperature Coefficient=100ppm/°C, Tolerance=1%, Working Voltage=50V, Additional Feature=ANTI-SULFUR, Category="Chip SMD Resistors", ComponentLink1Description=https://datasheet.ciiva.com:443/pdfs/VipMasterIC/IC/YAGO/YAGO-S-A0009016998/YAGO-S-A0009016998-1.pdf?src-supplier=IHS+Markit, ComponentLink1URL=https://datasheet.ciiva.com:443/pdfs/VipMasterIC/IC/YAGO/YAGO-S-A0009016998/YAGO-S-A0009016998-1.pdf?src-supplier=IHS+Markit, ComponentLink2Description=https://www.yageo.com/upload/media/product/productsearch/datasheet/rchip/PYu-AF_51_RoHS_L_6.pdf?src-supplier=Digikey, ComponentLink2URL=https://www.yageo.com/upload/media/product/productsearch/datasheet/rchip/PYu-AF_51_RoHS_L_6.pdf?src-supplier=Digikey, Construction=Rectangular, Manufacturer Part Number=AF0402FR-071K13L, Mounting Technology="Surface Mount", Packaging="Tape and Reel", Pins=2, Pricing="1=0,15, 10=0,037, 50=0,037, 100=0,02, 1000=0,012, 10000=0,006 (USD)", Reach SVHC Compliant=Yes, Reference Standard=AEC-Q200, RoHS=Yes, RoHS Compliant=Yes, Stock=3100, Supplier=Mouser, Termination=Wraparound
R11 R12: library part ERJ-PA2F4701X, "Thick Film Resistors - SMD 0402 1% 4.7Kohm Anti-Surge AEC-Q200", Manufacturer_Name=Panasonic, Mouser Part Number=667-ERJ-PA2F4701X, Arrow Part Number=ERJ-PA2F4701X, Arrow Price/Stock=https://www.arrow.com/en/products/erj-pa2f4701x/panasonic?region=nac, Datasheet Link=http://industrial.panasonic.com/cdbs/www-data/pdf/RDO0000/AOA0000C331.pdf, Height=0.4mm, Manufacturer_Part_Number=ERJ-PA2F4701X, Mouser Price/Stock=https://www.mouser.co.uk/ProductDetail/Panasonic/ERJ-PA2F4701X?qs=h9NfwcE6J0JdNXujYyUhOg%3D%3D
R13: library part RK73B1JTTDD154J, "Thick Film Resistors - SMD 1/10W 150K OHM 5%", Manufacturer_Name="KOA Speer", Mouser Part Number=660-RK73B1JTTDD154J, Datasheet Link=http://www.koaspeer.com/catimages/Products/RK73-RT/RK73-RT.pdf, Height=0.55mm, Manufacturer_Part_Number=RK73B1JTTDD154J, Mouser Price/Stock=https://www.mouser.co.uk/ProductDetail/KOA-Speer/RK73B1JTTDD154J?qs=eQc%252BYniTHCffTX8fUgD2hw%3D%3D
S1 S2 S3 S4: "Keypad Switch, 1 Switches, SPST, Momentary-tactile, 0.02A, 12VDC, 1.57N, 2 PCB Hole Cnt, Solder Terminal, Surface Mount-right Angle", Manufacturer=E-Switch, Supplier Part Number=612-TL6340AF160QG, Category="Tactile Switches", ComponentLink1Description=https://datasheet.octopart.com/TL6340AF160Q-E-Switch-datasheet-155697155.pdf?src-supplier=Future+Electronics, ComponentLink1URL=https://datasheet.octopart.com/TL6340AF160Q-E-Switch-datasheet-155697155.pdf?src-supplier=Future+Electronics, ComponentLink2Description=https://datasheet.octopart.com/TL6340AF160Q-E-Switch-datasheet-165860010.pdf?src-supplier=TME, ComponentLink2URL=https://datasheet.octopart.com/TL6340AF160Q-E-Switch-datasheet-165860010.pdf?src-supplier=TME, Manufacturer Part Number=TL6340AF160Q, Pricing="1=0,51, 10=0,478, 50=0,478, 100=0,377, 1000=0,313, 10000=0,255 (USD)", RoHS=Yes, Stock=2006, Supplier=Mouser
U1: "Bluetooth Modules - 802.15.1 nRF5340, PCB antenna, open CPU", Manufacturer=u-blox, Supplier Part Number=377-NORA-B106-00B, Category=LDO, ComponentLink1Description=https://datasheet.octopart.com/NORA-B106-00B-u-blox-datasheet-166811452.pdf?src-supplier=TME, ComponentLink1URL=https://datasheet.octopart.com/NORA-B106-00B-u-blox-datasheet-166811452.pdf?src-supplier=TME, Manufacturer Part Number=NORA-B106-00B, Pricing="1=14, 10=12,74, 50=11,72, 100=10,9, 1000=10,9, 10000=10,9 (USD)", RoHS=No, Stock=4440, Supplier=Mouser
X1: "Adafruit Accessories JST-PH 2-pin SMT Right Angle Connect", Manufacturer_Name=Adafruit, Mouser Part Number=485-1769, Arrow Part Number=1769, Arrow Price/Stock=https://www.arrow.com/en/products/1769/adafruit-industries?utm_currency=USD&region=nac, Datasheet Link=https://cdn-shop.adafruit.com/datasheets/17311.pdf, Height=5.5mm, Manufacturer_Part_Number=1769, Mouser Price/Stock=https://www.mouser.co.uk/ProductDetail/Adafruit/1769?qs=GURawfaeGuBbgoGtf2XstA%3D%3D
X2: library part 4048, "Mini SWD 0.05 Pitch Connector - 10 Pin SMT Box Header", Manufacturer="Adafruit Industries", Supplier Part Number=485-4048, Category=Connectors, ComponentLink1Description=https://media.digikey.com/pdf/Data%20Sheets/Adafruit%20PDFs/4048_Web.pdf?src-supplier=Digikey, ComponentLink1URL=https://media.digikey.com/pdf/Data%20Sheets/Adafruit%20PDFs/4048_Web.pdf?src-supplier=Digikey, Manufacturer Part Number=4048, Pricing="1=1,95, 10=1,95, 50=1,95, 100=1,95, 1000=1,95, 10000=1,95 (USD)", RoHS=No, Stock=723, Supplier=Mouser

## Free pads (board coordinates)
  round 2 hole 2 unplated paste-2539.97 mask+0: 1(34.261,59.101) 1(36.962,35.131) 1(56.086,35.151)

## Via types
v1: diameter 0.6, hole 0.3, Top Layer to Bottom Layer, tented both sides, 107 vias

## Nets (pads, with @x,y where several pads share a name; then routed paths per layer and width w, separated by ;. In a path a pad name is that pad's centre, name@x,y a point inside that pad or via, vN(x,y) a via of type N, cw(c..) or ccw(c..) an arc to the next point about the centre after c; other vN are vias at no path point)
+3V3: C5.2 C6.2 C7.2 C8.2 C21.2 C22.1 C23.1 IC2.1 IC2.2 IC3.7 IC4.5 IC4.8 IC4.12 IC6.3 IC7.8 J3.7 J4.3 Q1.2 R11.1 R12.1 R13.2 U1.A7 U1.A8 U1.B7 X2.1 | length 44.2
  Top Layer w0.15: 56.324,64.876 56.727,64.876 57.927,63.676 J4.3
  Top Layer w0.254: J3.7 40.787,29.55 61.098,29.55 62.749,31.201 X2.1 ; C8.2 C7.2 39.544,53.043 39.811,52.777 IC4.5 40.088,52.775 40.582,52.775 41.58,51.777 IC4.12 ; C21.2 40.274,47.75 IC6.3 IC6.3 ; C23.1 42.901,43.674 44.046,43.674 C22.1 ; IC2.1 51.199,60.701 C5.2 51.349,60.555 51.699,60.905 IC2.2 ; U1.A8 U1.A7 U1.B7 ; C6.2 59.507,59.506 59.539,59.474 60.126,59.474 IC3.7 ; R13.2 62.099,65.576 62.545,65.13 Q1.2
+4V5: C1.2 C4.2 IC1.10 IC1.11 IC2.5 IC2.7 IC2.8 R4.1 R5.1 | length 5.7
  Top Layer w0.18: IC1.10 50.601,68.476 C1.2 ; IC1.11 50.534,68.976 50.8,68.71 C1.2 ; R4.1 51.499,67.931 51.21,68.22 51.21,68.23 51.01,68.43 51.01,68.465 C1.2
  Top Layer w0.254: C4.2 52.566,65.059 52.566,64.471 52.676,64.361 52.676,63.899 IC2.5
+VBAT: C3.2 IC1.2 IC1.3 X1.2 | length 1.6
  Top Layer w0.254: C3.2 45.404,68.281 45.966,68.281 46.139,68.453 IC1.3@46.947,68.453
BTN1: S1.2 U1.A4 | length 29.9
  Top Layer w0.15: 51.47,49.597 U1.A4@54.349,49.597
  Top Layer w0.254: S1.2@29.124,38.526 29.161,38.489 32.736,38.489 v1(32.774,38.451) ; v1(44.249,45.376) 45.774,45.376 47.295,46.897 48.77,46.897 51.47,49.597
  Bottom Layer w0.254: v1(32.774,38.451) 39.699,45.376 v1(44.249,45.376)
BTN2: S2.2 U1.D3 | length 30.1
  Top Layer w0.254: S2.2@29.124,44.776 30.399,44.776 v1(31.749,46.126) ; v1(56.949,48.501) 56.961,48.489 57.636,48.489 U1.D3
  Bottom Layer w0.254: v1(31.749,46.126) 31.823,46.126 32.071,46.374 50.684,46.374 51.609,47.299 55.747,47.299 v1(56.949,48.501) v1@56.976,48.528
BTN3: S3.2 U1.A5 | length 27.6
  Top Layer w0.254: S3.2@29.124,51.126 29.483,51.126 29.706,51.349 29.706,51.708 31.449,53.451 v1(32.874,53.451) ; v1(53.199,51.078) 53.293,51.078 53.366,51.151 53.874,51.151 U1.A5
  Bottom Layer w0.254: v1(32.874,53.451) 43.386,53.451 45.759,51.078 v1(53.199,51.078)
BTN4: S4.2 U1.C4 | length 38.2
  Top Layer w0.15: 53.624,50.051 53.674,50.101 56.024,50.101 U1.C4
  Top Layer w0.254: S4.2@29.124,57.351 29.874,57.351 v1(30.474,57.951) ; v1(45.424,47.126) 48.349,50.051 53.624,50.051
  Bottom Layer w0.254: v1(30.474,57.951) 31.874,56.551 31.874,48.751 33.326,47.299 45.157,47.299 45.33,47.126 v1(45.424,47.126)
CHG: IC1.9 R4.2 U1.C8 | length 18.4
  Top Layer w0.15: v1(55.924,56.499) 55.974,56.449 55.974,54.551 U1.C8
  Top Layer w0.254: IC1.9 49.697,67.953 50.2,67.953 50.349,67.804 ; R4.2 50.349,67.101 50.349,67.804 ; v1(50.807,67.716) 50.741,67.782 50.371,67.782 50.349,67.804
  Bottom Layer w0.254: v1(50.807,67.716) 50.807,61.143 55.451,56.499 v1(55.924,56.499)
CS: J3.2 U1.G1 | length 18.6
  Top Layer w0.254: J3.2 51.756,31.821 51.756,33.551 59.246,41.041 59.246,43.885 60.949,45.588 U1.G1
DC: J3.3 U1.G2 | length 20.8
  Top Layer w0.15: 60.453,45.78 60.453,45.854 60.424,45.883 60.424,46.851 U1.G2
  Top Layer w0.254: J3.3 48.946,31.711 57.999,40.764 57.999,43.326 60.453,45.78
GND: C1.1 C2.1 C3.1 C4.1 C5.1 C6.1 C7.1 C8.1 C21.1 C22.2 C23.2 C24.2 D1.2 IC1.4 IC1.6 IC1.8 IC1.15 IC1.17 IC2.4 IC2.9 IC3.3 IC3.5 IC3.8 IC3.10 IC4.1 IC4.6 IC4.7 IC6.6 IC7.4 J1.A1B12 J1.B1A12 J1.S1 J1.S2 J1.S3 J1.S4 J3.6 J4.5 J4.6 J4.7 J4.8 R1.2 R2.2 R3.2 R6.1 R7.1 S1.1 S2.1 S3.1 S4.1 U1.A1 U1.A9 U1.B2 U1.B8 U1.E4 U1.E5 U1.F4 U1.F5 U1.K2 U1.K3 U1.K5 U1.K7 U1.K8 U1.L1 U1.L9 U1.M1 U1.M2 U1.M8 U1.M9 X1.1 X2.5 | length 72.1
  Top Layer w0.254: S1.1 30.281,35.726 30.49,35.517 30.49,35.242 v1(30.556,35.176) ; S4.1 30.428,54.551 30.577,54.402 30.577,54.055 v1(30.631,54.001) ; S2.1 29.496,41.961 30.263,41.961 30.54,41.684 30.54,41.367 v1(30.606,41.301) ; S3.1 30.381,48.326 30.728,47.979 30.728,47.579 v1(30.756,47.551) ; v1(35.656,72.176) 36.124,71.708 36.124,69.826 X1.1 ; v1(37.849,54.377) 37.861,54.364 38.591,54.364 C7.1 ; v1(37.849,55.377) C8.1 ; v1(38.731,45.644) 38.731,46.304 38.804,46.377 IC6.6 ; v1(39.299,51.752) 39.322,51.775 40.084,51.775 IC4.7 ; v1(39.324,52.377) 39.418,52.377 39.516,52.279 40.084,52.279 IC4.6 ; C21.1 40.279,49.576 41.035,49.576 v1(41.039,49.581) ; IC4.1 41.749,53.927 42.046,54.224 42.396,54.224 v1(42.449,54.277) ; v1(42.899,42.001) C23.2 ; v1(43.599,69.751) R7.1 ; v1(44.024,41.951) 44.036,41.964 44.036,42.664 C22.2 ; v1(45.399,66.526) C3.1 ; v1(45.649,70.676) R6.1 ; v1(46.399,67.301) 46.401,67.303 46.401,67.953 46.424,67.976 IC1.4 ; v1(47.199,72.976) D1.2 ; v1(47.29,66.326) 47.356,66.392 47.603,66.392 47.901,66.691 47.901,67.203 IC1.6 ; v1(47.849,71.201) 47.901,71.149 47.901,70.249 IC1.15 47.924,68.726 IC1.17 48.924,67.976 IC1.8 ; IC7.4 49.467,37.801 v1(50.349,37.801) ; v1(49.549,60.776) 49.615,60.71 50.19,60.71 C5.1 ; C2.1 50.44,71.601 50.69,71.351 v1(50.749,71.351) ; C1.1 52.341,68.675 52.65,68.366 v1(52.65,68.3) ; IC2.9 52.299,62.826 52.676,62.449 52.676,61.799 IC2.4 52.699,61.576 52.949,61.326 v1@53.174,61.326 ; R3.2 52.074,69.926 52.849,69.926 v1(52.874,69.951) ; v1(53.324,46.526) 53.393,46.526 53.668,46.251 54.324,46.251 U1.A1 55.276,47.203 U1.B2 ; C4.1 v1(53.549,65.826) ; v1(53.624,55.101) 53.636,55.089 54.336,55.089 U1.A9 54.522,54.903 U1.B8 ; v1(54.431,67.276) 54.49,67.217 55.706,67.217 55.899,67.41 J1.B1A12 ; v1(56.678,63.251) J4.7 ; v1(57.449,61.401) 57.835,61.787 57.835,62.004 57.871,62.039 J4.6 ; v1(57.599,60.601) 57.665,60.535 58.86,60.535 C6.1 ; R1.2 58.166,66.964 58.968,66.964 v1(58.981,66.951) ; v1(58.824,64.974) 58.824,64.491 J4.8 ; v1(59.183,58.696) 59.277,58.696 59.509,58.928 60.126,58.928 IC3.8 ; v1(59.324,50.701) 58.774,50.701 58.749,50.676 ; U1.F4 U1.E4 58.749,50.676 ; U1.F5 U1.E5 58.749,50.676 ; J4.5 60.589,63.226 v1(61.038,63.226) ; v1(61.074,57.326) 61.086,57.339 61.086,58.264 IC3.10@61.099,58.276 ; IC3.5@61.099,60.426 v1(61.099,61.076) ; R2.2 v1(61.774,66.976) ; v1(61.609,61.464) 61.676,61.398 62.022,61.398 62.329,61.091 C24.2 ; IC3.3 62.072,59.474 62.659,59.474 63.235,60.05 v1(63.235,60.076) ; J1.A1B12 62.299,68.026 62.908,67.417 62.908,67.242 v1(62.974,67.176) ; v1(64.099,52.126) 64.224,52.126 64.249,52.151 64.165,52.235 64.165,52.792 U1.K7 U1.K8 ; v1@64.125,52.017 64.099,51.991 v1(64.099,51.426) 64.165,51.36 64.165,50.76 U1.K5 64.14,50.567 64.14,49.967 v1(64.074,49.901) v1(64.074,49.251) 64.14,49.185 64.14,48.585 U1.K3 U1.K2 ; v1(65.024,46.126) 65.09,46.192 65.665,46.192 U1.L1 65.833,46.192 66.483,46.192 v1(66.549,46.126) ; v1(65.024,55.301) 65.09,55.235 65.59,55.235 U1.L9 65.922,55.249 66.353,55.249 66.43,55.326 v1(66.524,55.326) 66.618,55.326 66.695,55.249 67.076,55.249 U1.M9 U1.M8 ; v1@66.549,46.151 66.59,46.192 67.165,46.192 U1.M1 U1.M2
  other v1: 43.306,32.951 53.131,37.276 33.499,37.751 60.924,44.676 48.899,45.126 32.149,45.176 46.999,45.326 46.349,47.001 42.899,48.501 42.824,49.702 43.749,51.152 52.524,51.726 53.274,55.876 57.174,56.951 55.924,57.326 53.217,61.34 46.824,65.301
INT1_LIS: IC4.4 U1.E3 | length 22.6
  Top Layer w0.2: IC4.4 40.274,53.465 40.274,53.843 40.574,54.143 v1(40.574,54.252)
  Top Layer w0.254: v1(58.618,49.332) 58.618,49.223 58.749,49.093 U1.E3
  Bottom Layer w0.254: v1(40.574,54.252) 41.398,55.076 43.749,55.076 46.249,52.576 54.453,52.576 57.697,49.332 v1(58.618,49.332)
INT2_LIS: IC4.9 U1.F3 | length 23.8
  Top Layer w0.2: IC4.9 40.774,51.089 40.774,50.71 40.996,50.488 v1(40.996,50.38)
  Top Layer w0.254: v1(59.524,49.301) 59.849,48.976 U1.F3
  Bottom Layer w0.2: v1(40.996,50.38) 41.089,50.38 41.639,49.829 41.639,47.878 41.791,47.726 54.699,47.726 56.099,49.126 57.299,49.126 57.774,48.651 59.007,48.651 59.124,48.768 59.124,49.009 59.416,49.301 v1(59.524,49.301)
MIC_CLK: J4.2 U1.E9 | length 9.8
  Top Layer w0.15: v1(56.624,61.976) 56.696,62.048 57.149,62.048 57.927,62.826 J4.2
  Top Layer w0.254: v1(58.624,55.876) 58.686,55.814 58.686,55.139 U1.E9
  Bottom Layer w0.254: v1(56.624,61.976) 56.624,58.388 57.801,57.211 57.801,56.558 58.483,55.876 v1(58.624,55.876)
MIC_DATA: J4.1 U1.D7 | length 15.9
  Top Layer w0.15: J4.1 59.777,62.826 60.516,62.088 60.766,62.088 v1(60.852,62.001)
  Top Layer w0.254: v1(57.624,52.176) 57.636,52.189 57.636,52.864 U1.D7
  Bottom Layer w0.254: v1(57.624,52.176) 59.962,54.514 60.337,54.514 62.608,56.785 62.608,61.352 61.869,62.091 61.174,62.091 61.151,62.068 60.918,62.068 v1(60.852,62.001)
MIC_EN: Q1.1 R13.1 U1.G7 | length 19.1
  Top Layer w0.254: v1(60.949,52.176) U1.G7 ; v1(63.799,66.576) 63.776,66.553 63.776,65.678 R13.1 63.845,65.455 Q1.1
  Bottom Layer w0.254: v1(60.949,52.176) 61.015,52.242 61.515,52.242 63.799,54.526 63.799,59.753 63.862,59.816 63.862,66.513 v1(63.799,66.576)
MTR_EN: IC3.1 U1.G9 | length 3.8
  Top Layer w0.254: U1.G9 62.049,56.176 IC3.1
MTR_PWM: IC3.2 U1.H9 | length 4.9
  Top Layer w0.254: U1.H9 62.851,55.878 62.851,58.736 62.659,58.928 62.072,58.928 IC3.2
NetC24_1: C24.1 J4.4 Q1.3 | length 6
  Top Layer w0.15: J4.4 59.777,63.676 60.277,64.176 61.244,64.176 62.811,62.61 63.02,62.61 63.195,62.435 Q1.3
  Top Layer w0.254: Q1.3 63.269,62.152 C24.1
NetIC1_1: IC1.1 R7.2 | length 1.4
  Top Layer w0.254: R7.2 45.949,69.751 46.199,69.501 IC1.1@46.674,69.501
NetIC1_12: IC1.12 R3.1 | length 1.6
  Top Layer w0.254: IC1.12 49.924,69.476 49.947,69.499 49.947,69.752 50.096,69.901 R3.1
NetIC1_16: IC1.16 R6.2 | length 1.7
  Top Layer w0.254: R6.2 46.749,70.525 46.898,70.376 47.401,70.376 47.424,70.353 IC1.16
NetIC3_6: IC3.6 M1.- | length 2.6
  Top Layer w0.254: IC3.6 60.426,59.951 60.449,59.974 v1(60.449,60.576)
  Bottom Layer w0.254: M1.- 59.195,61.203 59.822,60.576 v1(60.449,60.576)
NetIC3_9: IC3.9 M1.+ | length 2.3
  Top Layer w0.254: IC3.9 60.276,58.451 60.299,58.428 v1(60.299,57.751)
  Bottom Layer w0.254: M1.+ 59.485,57.685 60.233,57.685 v1(60.299,57.751)
NetJ1_A5: J1.A5 R2.1 | length 1.3
  Top Layer w0.254: R2.1 J1.A5@60.344,68.296
NetJ1_B5: J1.B5 R1.1 | length 1.3
  Top Layer w0.254: R1.1 57.326,67.008 57.326,68.278 J1.B5
PGOOD: IC1.7 R5.2 U1.D8 | length 20.7
  Top Layer w0.15: v1(57.174,56.108) 57.124,56.057 57.124,54.501 U1.D8
  Top Layer w0.18: v1(47.624,65.226) 47.624,65.826 47.774,65.976 R5.2@48.424,65.976 ; IC1.7 R5.2@48.424,65.976 ; R5.2 R5.2@48.424,65.976
  Bottom Layer w0.254: v1(47.624,65.226) 47.624,61.701 51.849,57.476 53.599,57.476 55.203,55.872 56.809,55.872 56.978,56.041 57.108,56.041 v1(57.174,56.108)
QSPI_CS: IC7.1 U1.E1 | length 18.6
  Top Layer w0.254: IC7.1 45.644,37.377 46.494,36.526 50.131,36.526 58.089,44.484 58.089,45.616 U1.E1
QSPI_SCK: IC7.6 U1.F1 | length 13.6
  Top Layer w0.254: IC7.6 48.184,44.286 v1@48.349,44.451 ; v1(58.724,44.937) 58.79,45.004 58.79,45.217 U1.F1
  Bottom Layer w0.254: v1(48.412,44.449) 48.457,44.495 58.281,44.495 v1(58.724,44.937)
QSPI_SD0: IC7.5 U1.D2 | length 12.3
  Top Layer w0.15: 56.024,45.751 56.024,47.769 56.156,47.901 56.942,47.901 57.074,47.769 57.074,47.464 57.162,47.376 U1.D2
  Top Layer w0.254: IC7.5 49.454,44.331 50.349,45.226 55.499,45.226 56.024,45.751
QSPI_SD1: IC7.2 U1.E2 | length 16.5
  Top Layer w0.15: 56.53,45.339 57.098,45.907 57.098,46.643 57.306,46.851 58.224,46.851 U1.E2
  Top Layer w0.254: IC7.2 46.914,38.252 52.513,43.851 54.766,43.851 56.254,45.339 56.53,45.339
QSPI_SD2: IC7.3 U1.D1 | length 13.6
  Top Layer w0.254: IC7.3 48.184,38.252 51.914,41.981 54.021,41.981 57.635,45.595 57.635,46.262 U1.D1
QSPI_SD3: IC7.7 U1.F2 | length 20.2
  Top Layer w0.15: U1.F2 60.374,47.901 60.374,49.362 v1(60.428,49.415)
  Top Layer w0.254: IC7.7 46.914,44.316 v1@47.024,44.426
  Bottom Layer w0.254: v1(47.051,44.428) 48.449,45.826 58.799,45.826 60.549,47.576 60.549,48.388 60.428,48.51 v1(60.428,49.415)
RESET_N: U1.J3 X2.4 | length 9.6
  Top Layer w0.15: 62.868,44.595 62.868,45.224 62.624,45.468 62.624,47.951 U1.J3
  Top Layer w0.254: X2.4 62.749,40.501 61.597,41.653 61.597,43.324 62.868,44.595
RST: J3.1 U1.H1 | length 20.1
  Top Layer w0.254: J3.1 56.481,31.551 60.149,35.219 v1(60.149,43.901) ; U1.H1 62.074,46.251 62.074,45.205 v1(62.099,45.18)
  Bottom Layer w0.254: v1@60.159,43.911 61.159,43.911 62.036,44.788 62.036,45.116 v1(62.099,45.18)
SCL: J3.5 U1.G4 | length 31.6
  Top Layer w0.254: U1.G4 60.961,50.139 61.686,50.139 v1(61.699,50.151)
  Bottom Layer w0.254: J3.5 44.076,31.761 44.076,32.247 47.769,35.941 53.831,35.941 62.726,44.836 62.726,45.411 63.024,45.709 63.024,49.201 62.14,50.085 61.765,50.085 v1(61.699,50.151)
SDA: J3.4 U1.G3 | length 25.3
  Top Layer w0.254: J3.4@46.406,31.864 46.744,31.864 v1(52.181,37.301) ; U1.G3 60.949,49.067 61.098,49.216 61.464,49.216 v1(61.499,49.251)
  Bottom Layer w0.254: v1(52.181,37.301) 54.646,39.766 55.171,39.766 59.307,43.902 59.374,45.088 59.522,45.237 61.499,47.214 v1(61.499,49.251)
SENSOR_SCL: IC4.13 IC6.1 R12.2 U1.B4 | length 23
  Top Layer w0.15: v1(53.224,48.326) 53.599,47.951 54.742,47.951 54.924,48.133 54.924,49.051 U1.B4
  Top Layer w0.254: IC6.1 42.124,46.377 43.674,47.927 v1(43.674,48.752) 43.68,48.758 43.68,49.395 R12.2 43.686,49.839 42.624,50.902 42.624,52.128 42.475,52.277 IC4.13
  Bottom Layer w0.254: v1(43.674,48.752) 43.768,48.752 44.193,48.326 v1(53.224,48.326) 53.158,48.392 v1@52.958,48.392
SENSOR_SDA: IC4.14 IC6.2 R11.2 U1.A3 | length 21.6
  Top Layer w0.2: IC4.14 41.937,52.802 R11.2 43.768,52.795 43.768,52.183 v1(43.774,52.177) ; v1(53.651,49.003) 53.727,48.926 53.899,48.926 U1.A3
  Top Layer w0.254: IC6.2 41.032,47.027 42.074,48.069 42.074,50.008 42.149,50.083 v1(42.149,50.177)
  Bottom Layer w0.254: v1(42.149,50.177) 42.189,50.217 42.189,50.592 v1(43.774,52.177) 46.948,49.003 v1(53.651,49.003)
SWDCLK: U1.J2 X2.2 | length 13.2
  Top Layer w0.15: U1.J2 63.699,46.826 63.699,45.676
  Top Layer w0.254: X2.2 62.749,35.739 64.049,37.039 64.049,45.326 63.699,45.676
SWDIO: U1.H2 X2.3 | length 10.8
  Top Layer w0.15: 61.524,44.251 61.524,46.851 U1.H2
  Top Layer w0.254: 61.524,44.251 61.055,43.782 61.055,39.814 62.749,38.12 X2.3
VBUS: C2.2 D1.1 IC1.13 J1.A4B9 J1.B4A9 | length 20.1
  Top Layer w0.254: IC1.13 48.924,71.201 ; 48.949,71.201 48.949,72.853 49.272,73.176 52.324,73.176 55.324,70.176 58.037,70.176 ; J1.B4A9 56.872,68.474 56.872,68.898 56.872,69.011 58.037,70.176 ; J1.A4B9 61.326,68.474 61.326,68.898 61.326,69.011 60.161,70.176 58.037,70.176
pads on no net: IC1.5 IC1.14 IC2.3 IC2.6 IC3.4 IC4.2 IC4.3 IC4.10 IC4.11 IC6.4 IC6.5 J1.A6 J1.A7 J1.A8 J1.B6 J1.B7 J1.B8 S1.SH1 S1.SH2 S1.SH3 S2.SH1 S2.SH2 S2.SH3 S3.SH1 S3.SH2 S3.SH3 S4.SH1 S4.SH2 S4.SH3 U1.A2 U1.A6 U1.B1 U1.B3 U1.B5 U1.B6 U1.B9 U1.C1 U1.C2 U1.C5 U1.C6 U1.C9 U1.D9 U1.E7 U1.E8 U1.F7 U1.F8 U1.F9 U1.G5 U1.G8 U1.H3 U1.H7 U1.H8 U1.J1 U1.J4 U1.J5 U1.J7 U1.J8 U1.J9 U1.K1 U1.K9 X1.3 X1.4

## Polygon pours and split planes (outlines as drawn)
+3V3 on Top Layer "Top Layer-+3V3" (solid, remove dead copper, pour order 15): 36.852,30.908 38.734,29.026 61.456,29.026 64.006,31.576 64.006,33.576 61.581,33.576 60.781,32.776 60.781,30.074 41.704,30.074 40.902,30.876 38.111,30.876 40.902,30.876 40.902,42.433 45.972,42.433 45.972,44.533 38.169,44.533 38.086,47.509 40.902,47.509 40.902,53.708 44.245,53.708 44.198,48.851 45.652,48.851 45.652,52.608 55.752,52.608 55.752,54.308 53.577,54.308 52.777,55.108 52.777,58.833 60.627,58.833 60.627,60.098 56.924,60.098 56.924,65.008 62.552,65.008 62.552,66.108 55.718,66.108 54.702,65.092 54.702,60.098 54.702,61.03 52.047,61.03 52.052,62.116 50.849,62.14 50.849,59.996 50.762,59.908 35.939,59.908 35.939,40.471 36.852,39.558
+VBAT on Top Layer "+VBAT_L01_P008" (solid, remove dead copper, pour order 8): 36.956,72.301 41.849,72.301 41.849,69.126 47.074,69.126 47.074,67.451 36.956,67.451
VBUS on Top Layer "VBUS_L01_P007" (solid, remove dead copper, pour order 7): 48.924,70.226 54.949,70.226 55.874,69.301 57.624,69.301 58.074,69.751 60.261,69.751 60.786,69.226 61.549,69.226 61.549,71.501 55.324,71.501 52.574,74.251 48.924,74.251
+4V5 on Top Layer "+4V5_L01_P006" (solid, remove dead copper, pour order 6): 48.764,66.606 50.117,66.594 50.112,67.976 49.081,67.976 49.069,69.26 52,69.26 52,67.575 53.003,67.575 53.049,63.54 50.774,63.526 50.774,64.401 47.849,64.401 47.849,65.626 48.749,65.626
GND on GND1 "GND_L02_P000" (solid, remove dead copper, pour order 0): 20.475,74.825 20.475,75.4 73.55,75.4 73.55,26.2 21.625,26.2
GND on GND3 "GND_L03_P001" (solid, remove dead copper, pour order 1): 21.43,77.5 72.95,77.5 72.95,26.45 15.255,26.45

## Keep-outs
Keep-Out Layer:
  circle w0.254: c36.962,35.121 r1.383
  circle w0.254: c56.086,35.151 r1.383
  circle w0.254: c34.261,59.101 r1.383
  lines w0.508: 26.658,34.001 ccw(c-1494.274,46.501) 26.658,59.001 31.499,59.001 31.499,72.969 33.687,75.157 40.749,75.143 64.652,75.143 64.652,56.351 68.124,56.351 68.124,45.026 64.652,45.026 64.652,31.147 61.956,28.451 38.474,28.451 32.924,34.001 26.658,34.001

## Silkscreen, mask and mechanical layers (free items; w line width, h text height)
Top Overlay:
  lines w0.15: 55.831,66.476 55.967,66.476 ccw(c55.967,67.415) 56.631,66.751 ; 56.231,65.376 56.886,65.376 ccw(c56.886,68.442) 59.054,66.274
  text "+VBAT" at 37.978,71.973 h0.8
  text "GND" at 32.928,71.88 h0.8
  text "GND" at 58.178,42.28 h0.8
  text "RST" at 58.253,39.805 h0.8
  text "SWD" at 58.278,37.305 h0.8
  text "CLK" at 58.253,34.88 h0.8
  text "VCC" at 58.203,32.305 h0.8

## Text inside footprints (layer, text, board x,y; h text height)
U1: Mechanical 13 "PCB Edge" at 67.599,56.676 h0.61